# Altium PCB 电机驱动板-V5.0.PcbDoc (part 1 of 3)
Units mil, origin at the board's own origin, x right, y up, seen from the top; angles counter-clockwise.
Board outline 4724.41 x 4330.71 mil, 4 copper layers (Top Layer, NET-A, GND-A, Bottom Layer); 312 components, 201 nets, 977 pads, 515 vias.
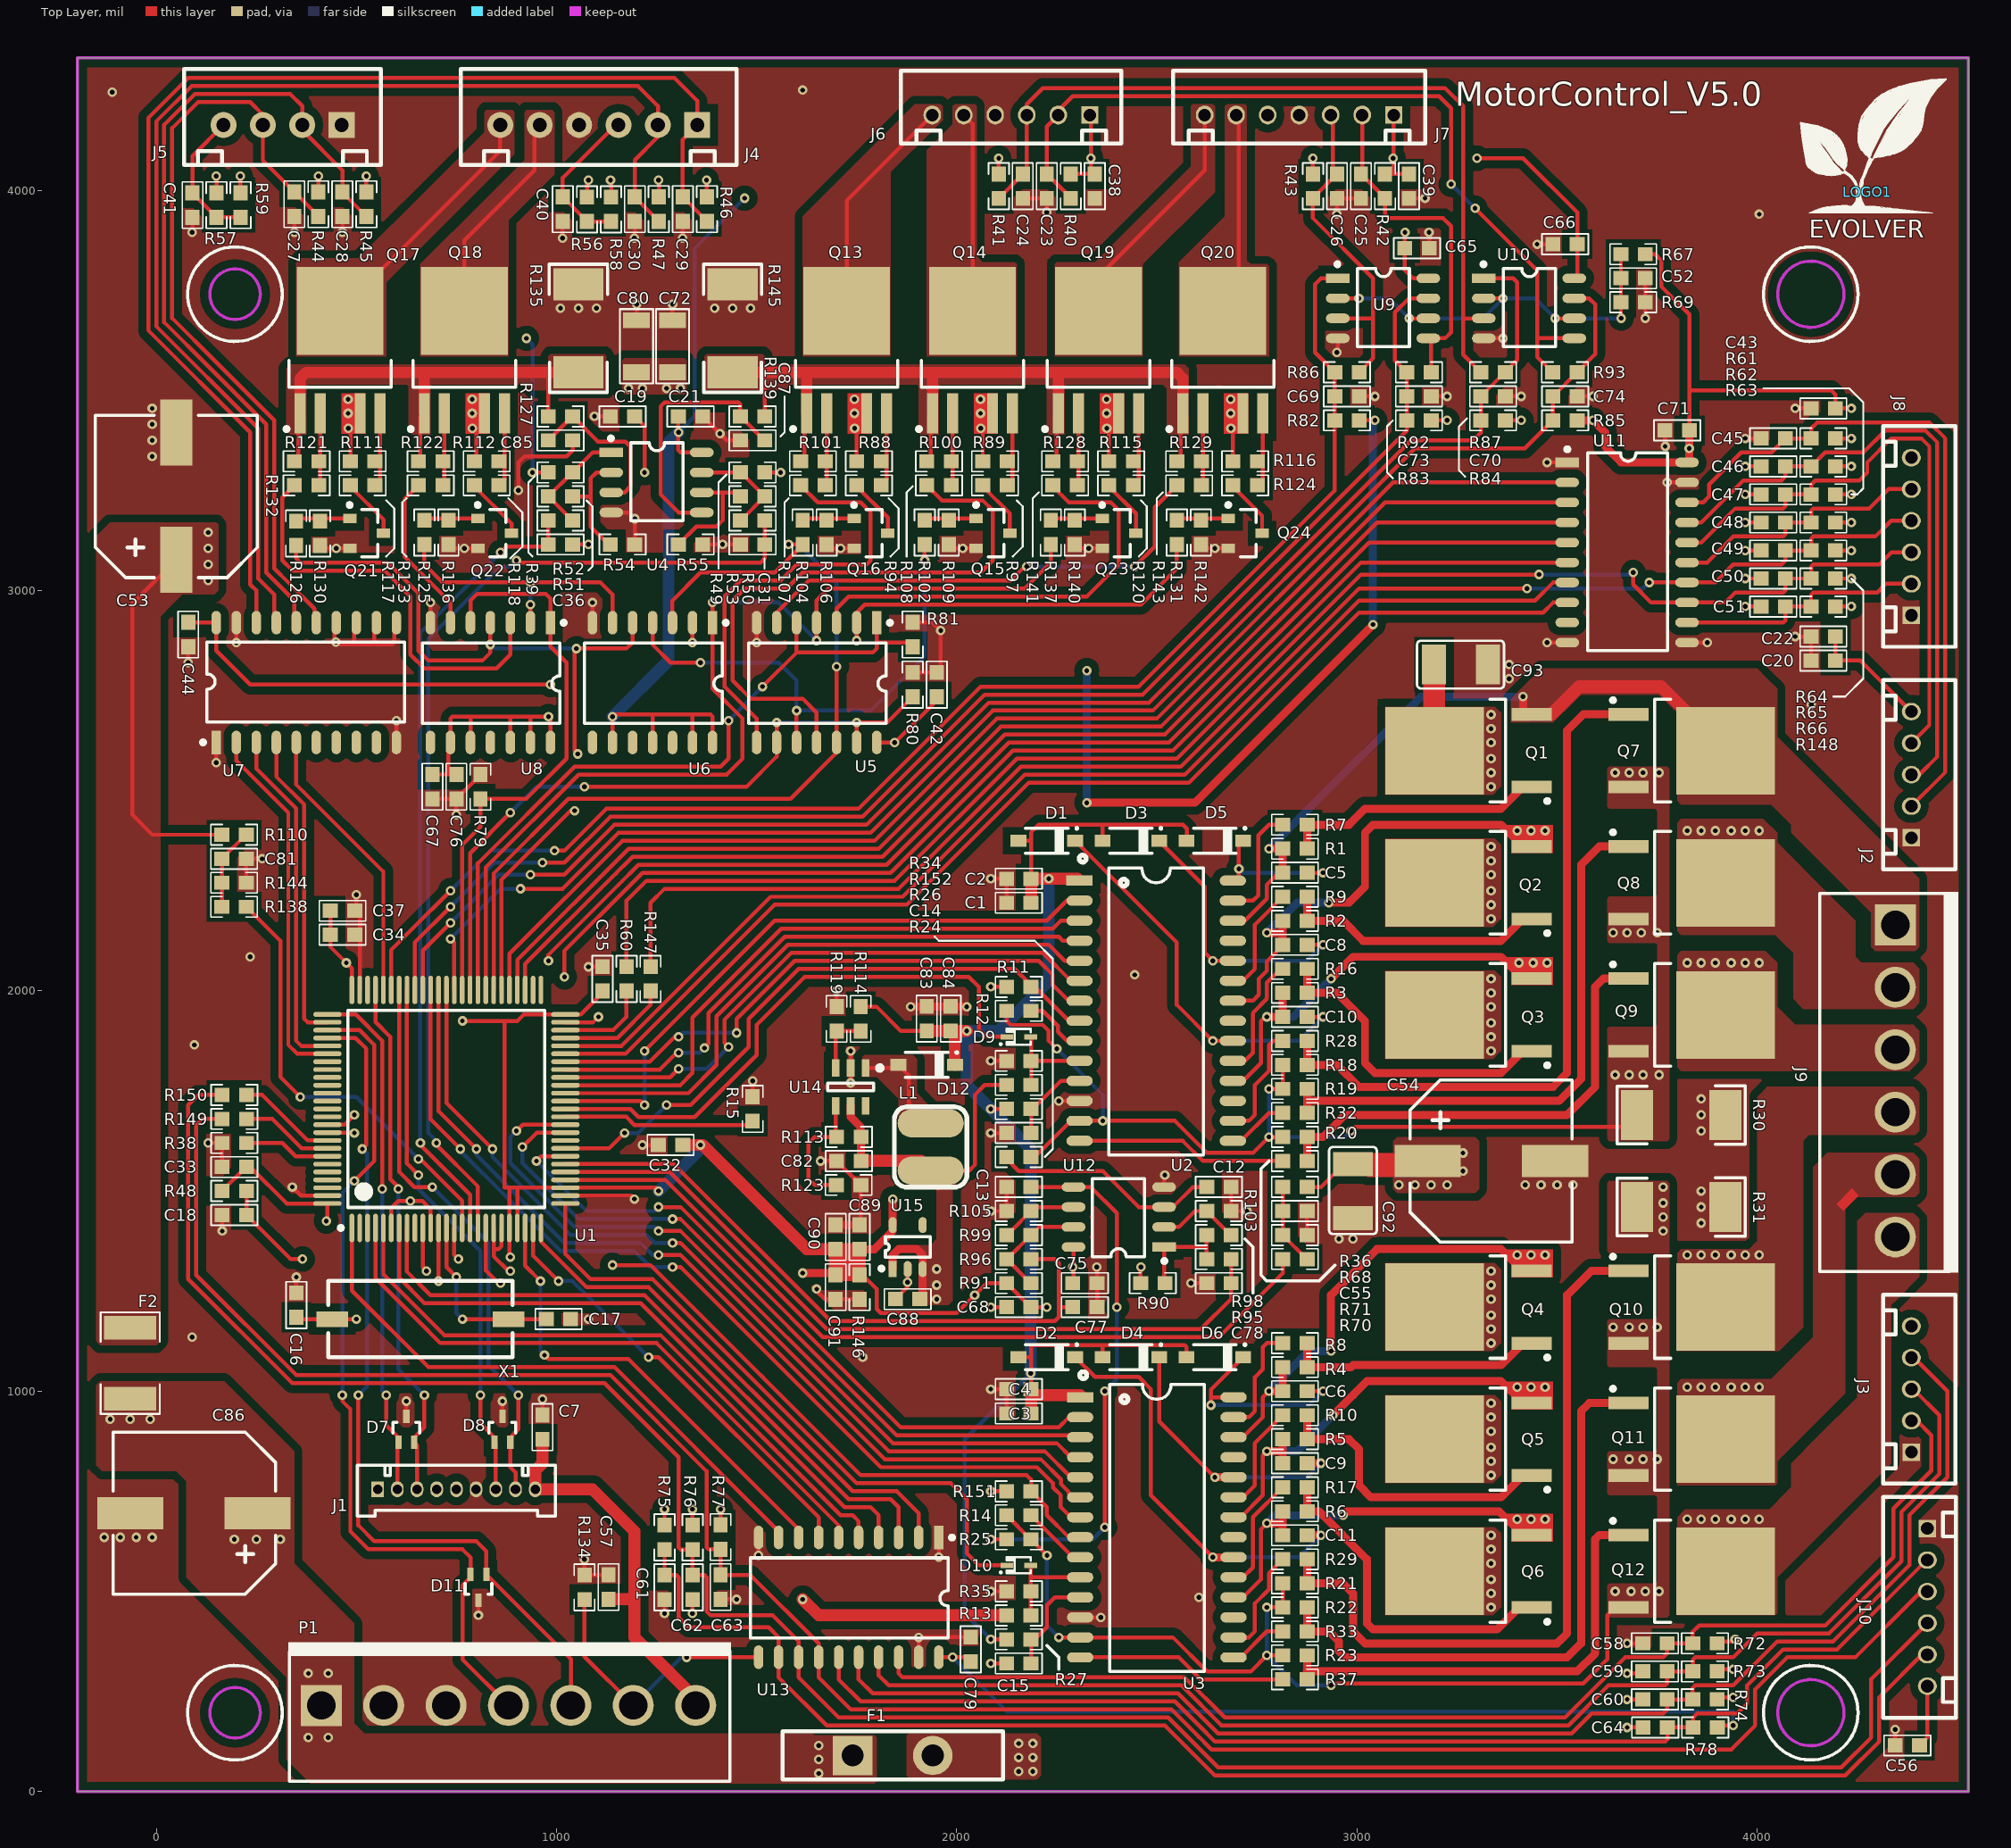
[diagram p0: Top Layer view]
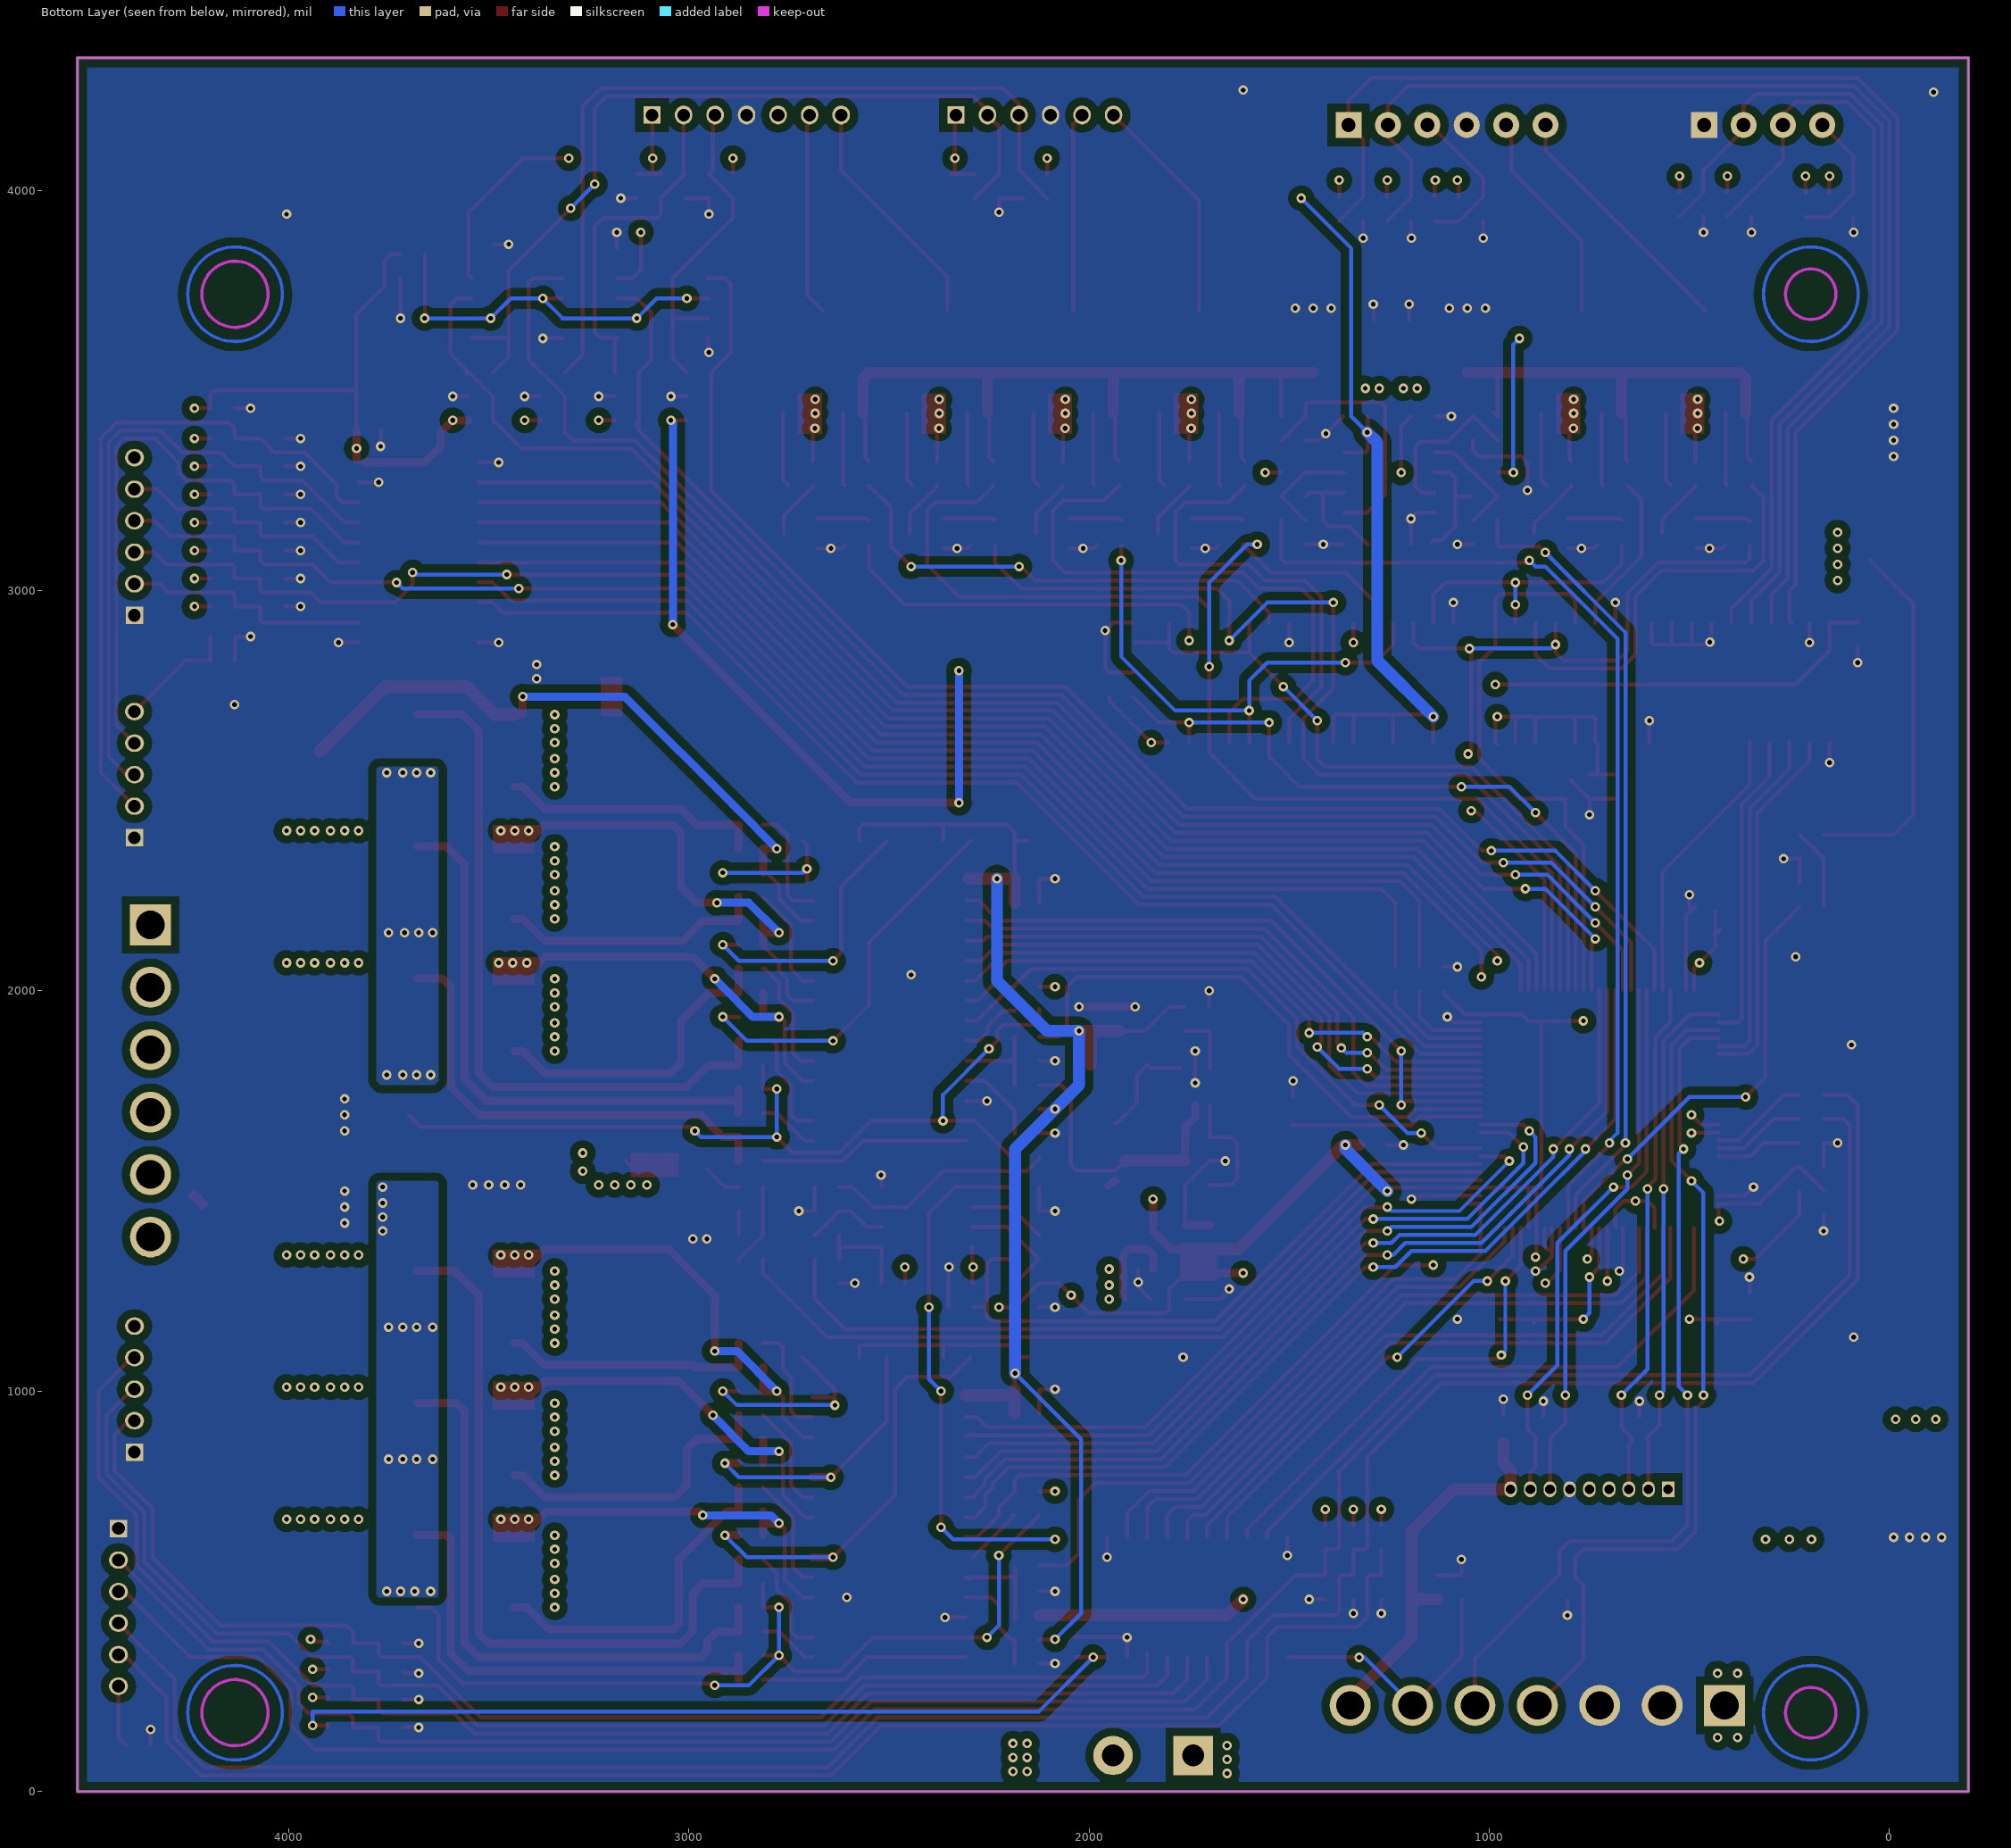
[diagram p1: Bottom Layer view, seen from below]
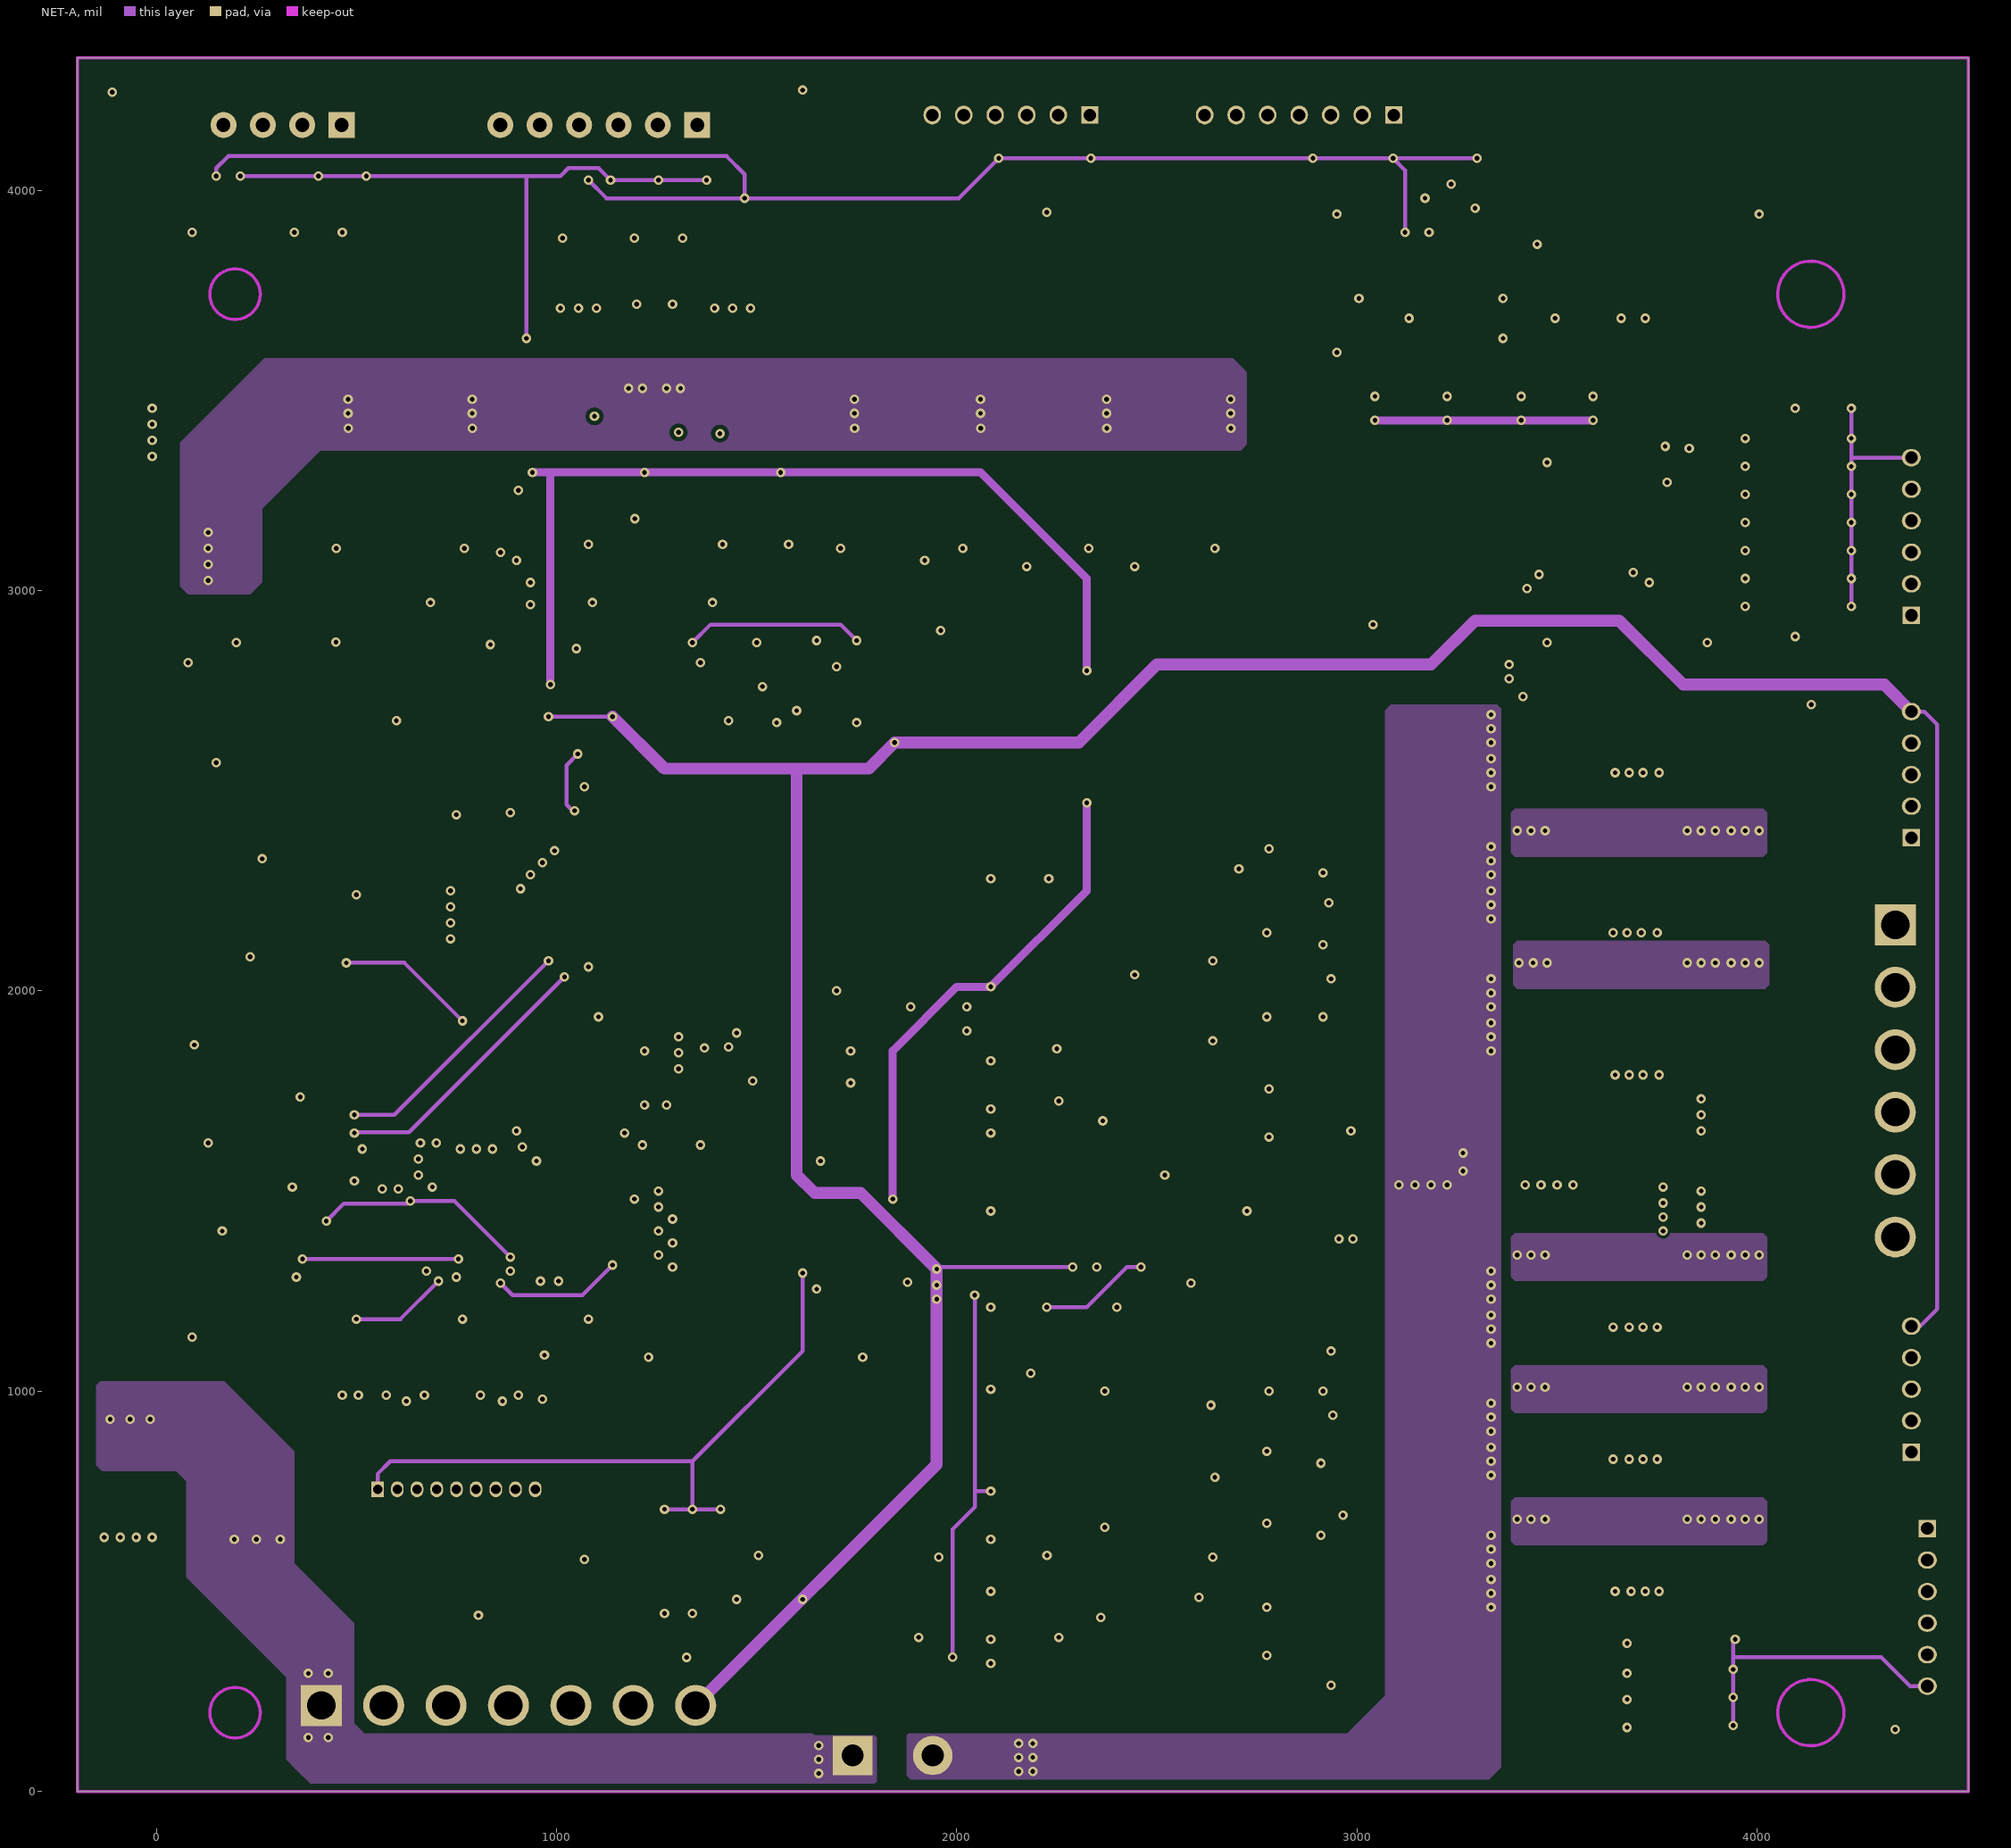
[diagram p2: NET-A]
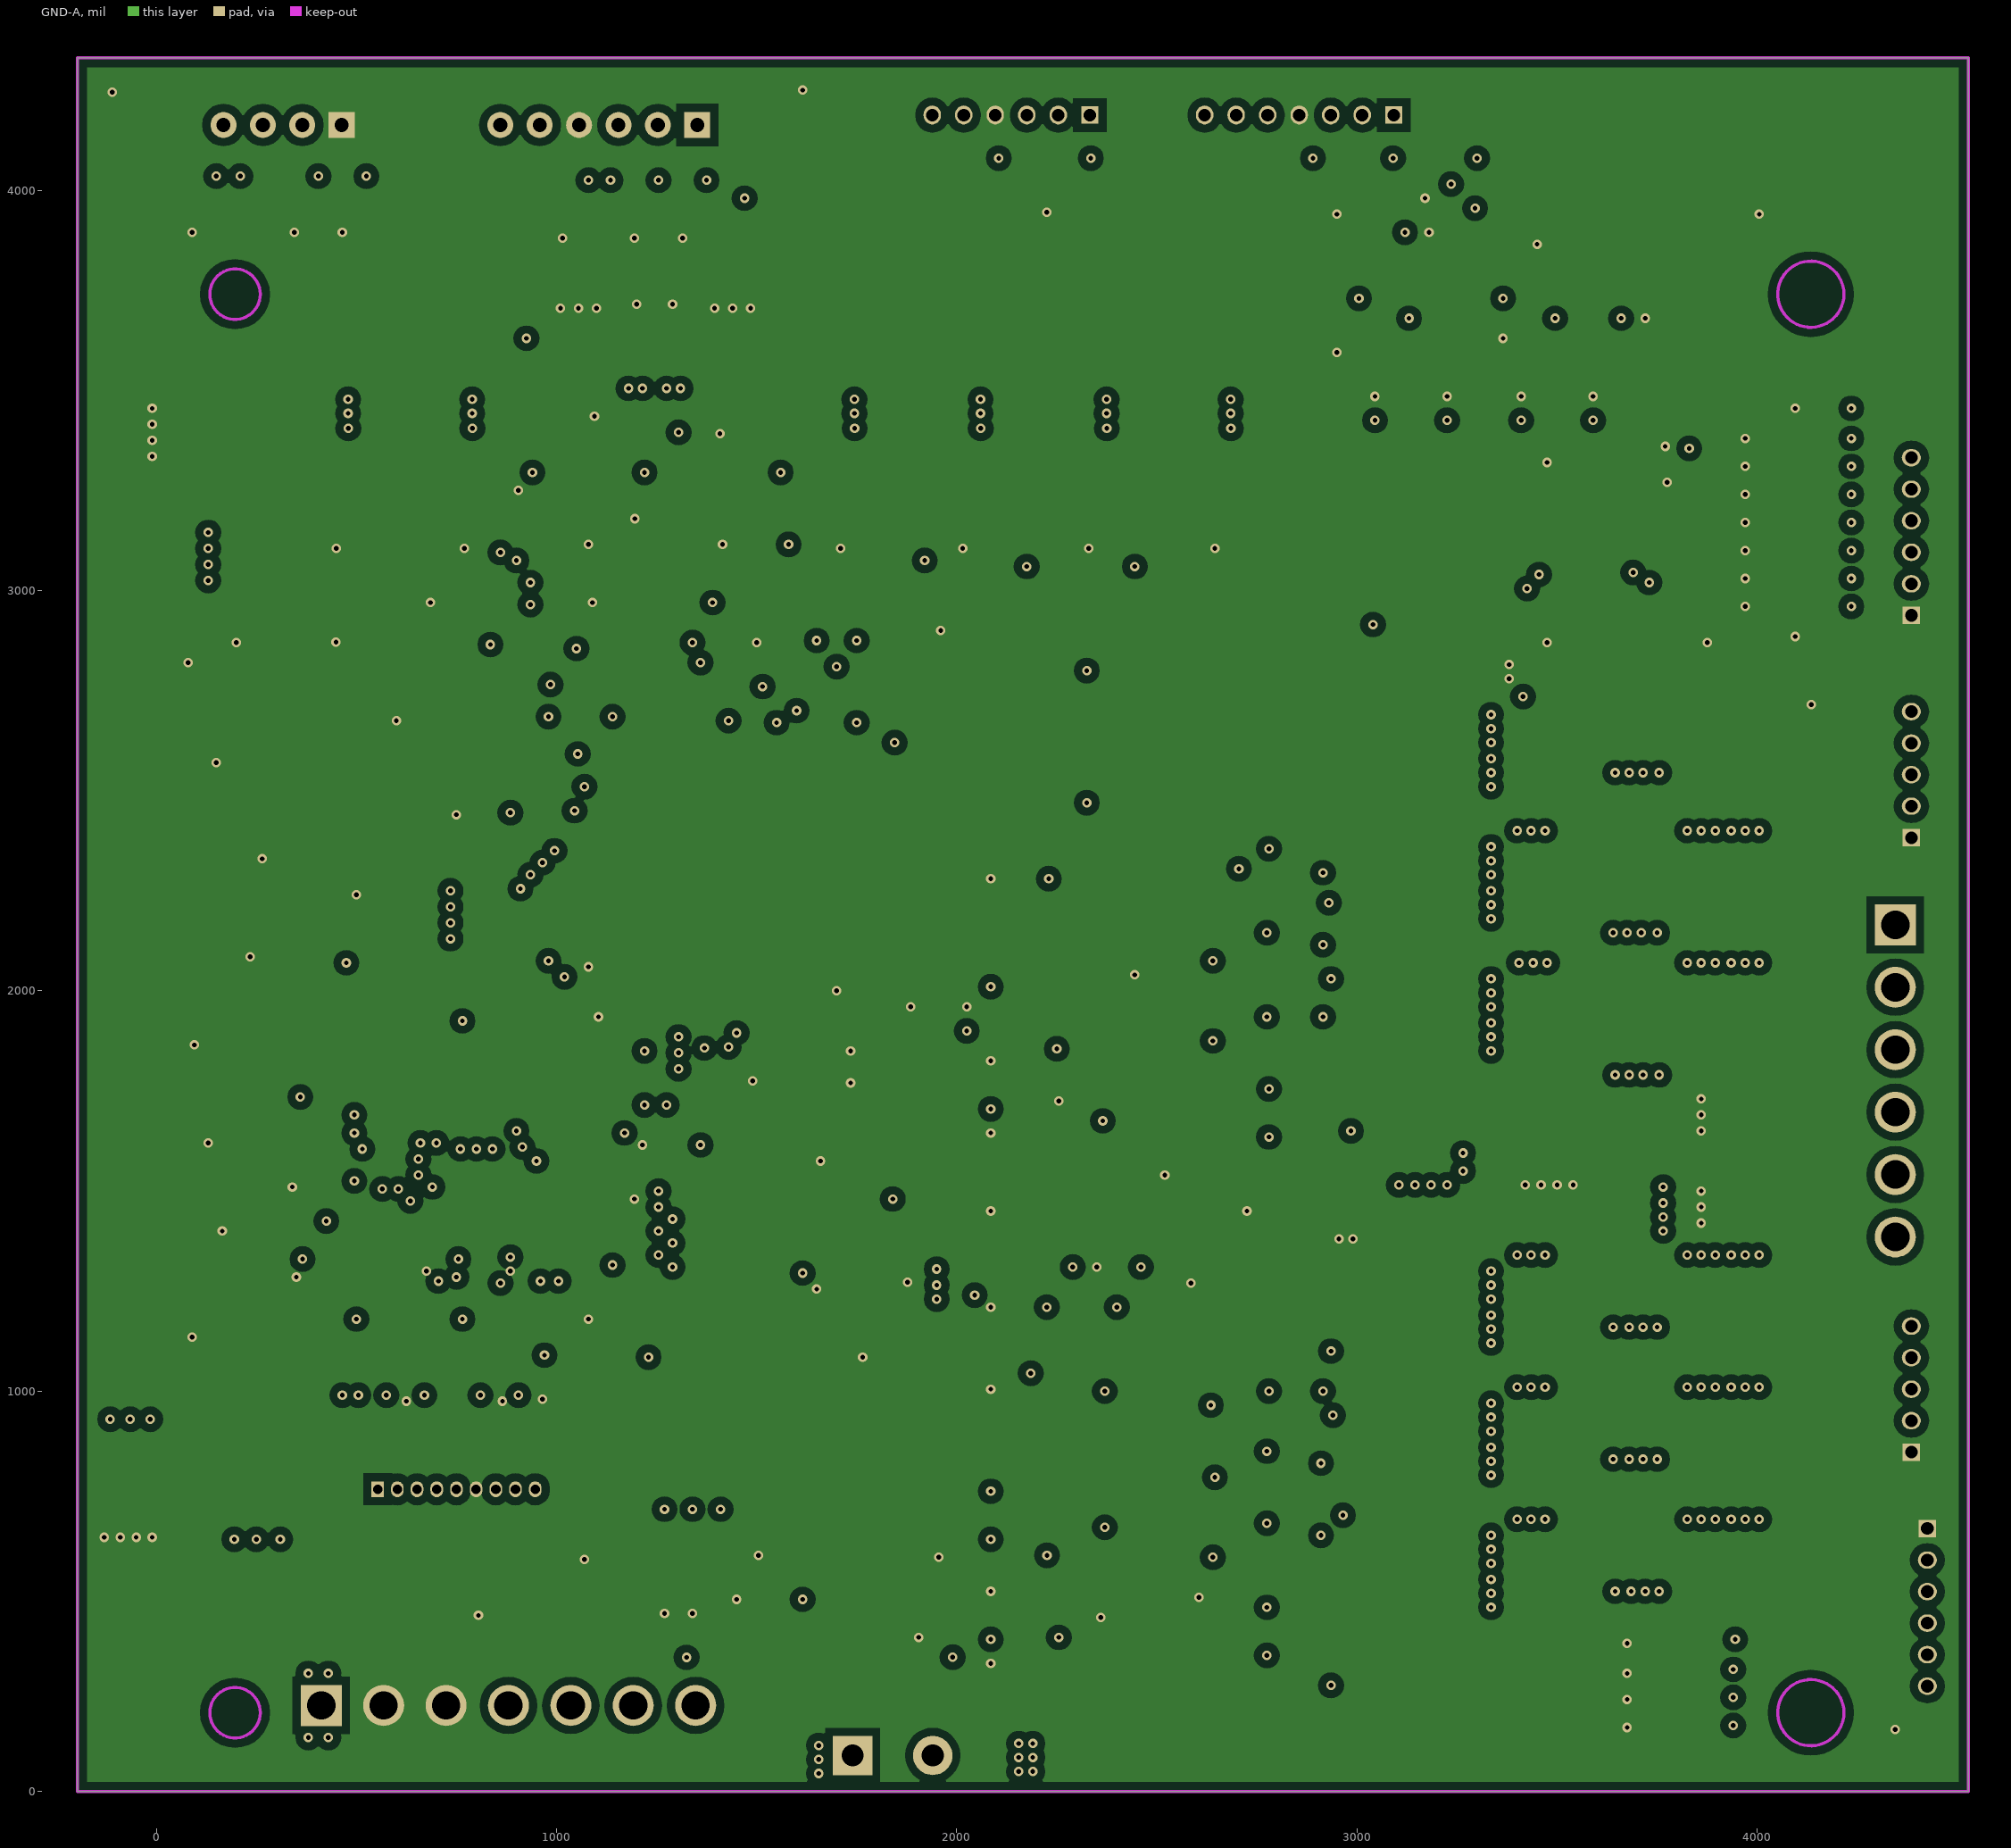
[diagram p3: GND-A]

## Layer stack, top to bottom
Top Layer: signal copper 1.4
Dielectric: core 12.6, FR-4, Dk 4.8
NET-A: signal copper 1.4
Dielectric: prepreg 12.6, FR-4, Dk 4.8
GND-A: signal copper 1.4
Dielectric: core 12.6, FR-4, Dk 4.8
Bottom Layer: signal copper 1.4

## Board outline
-196.85,0 -196.85,4330.71 4527.56,4330.71 4527.56,0

## Design rules (kind name [scope] priority, off if disabled: settings)
Clearance [All] p1: gap=7
ComponentClearance [All] p1: gap=0 collisioncheckmode=3 verticalgap=0 showdistances=FALSE
HoleToHoleClearance [All] p1: gap=0 allowstackedmicrovias=TRUE
MinimumSolderMaskSliver [All] p1: minsoldermaskwidth=0
PlaneConnect [All] p1: planeconnectstyle=Direct reliefexpansion=20 reliefentries=4 reliefconductorwidth=10 reliefairgap=10
PolygonConnect [All] p1: connectstyle=Direct reliefconductorwidth=10 reliefentries=4 polygonreliefangle="90 Angle"
RoutingVias [All] p1: holewidth=11.81 width=23.62 viastyle="Through Hole" minholewidth=11.81 minwidth=23.62 maxholewidth=118.11 maxwidth=236.22
SilkToSilkClearance [All] p1: silktosilkclearance=0
SilkscreenOverComponentPads [All] p1: minsilkscreentomaskgap=0
SolderMaskExpansion [All] p1: expansion=4
TestPointUsage [All] p1: valid=0 allowmultiple=FALSE
Testpoint [All] p1: side=15 testpointundercomponent=TRUE minsize=40 maxsize=100 preferedsize=60 minholesize=0 maxholesize=40 preferedholesize=32 testpointgrid=1 style=1023 order=0123456789
Width [All] p1: maxlimit=500 minlimit=7 preferedwidth=10
18 further rules are at their usual default settings.

## Components (designator, comment, footprint, x,y, rotation, side; value= is the part's Value field where it differs from the comment)
C1 "C0603" C0603_M1608 2155,2220 r180 top
C2 "C0603" C0603_M1608 2155,2280 r180 top
C3 "C0603" C0603_M1608 2155.03,944.4 r180 top
C4 "C0603" C0603_M1608 2155,1005 r180 top
C5 "C0603" C0603_M1608 2845,2295 r180 top
C6 "C0603" C0603_M1608 2845,1000 r180 top
C7 "C0603" C0603_M1608 965,910 r270 top
C8 "C0603" C0603_M1608 2845,2115 r180 top
C9 "C0603" C0603_M1608 2845,820 r180 top
C10 "C0603" C0603_M1608 2845,1935 r180 top
C11 "C0603" C0603_M1608 2845,640 r180 top
C12 "C0603" C0603_M1608 2655,1510 r0 top
C13 "C0603" C0603_M1608 2155,1510 r180 top
C14 "C0603" C0603_M1608 2155,1645 r180 top
C15 "C0603" C0603_M1608 2155,320 r180 top
C16 "C0603" C0603_M1608 350,1215 r270 top
C17 "C0603" C0603_M1608 1005,1180 r180 top
C18 "C0603" C0603_M1608 195,1440 r0 top
C19 "C0603" C0603_M1608 1165,3435 r180 top
C20 "C0603" C0603_M1608 4165,2825 r0 top
C21 "C0603" C0603_M1608 1335,3435 r0 top
C22 "C0603" C0603_M1608 4165,2885 r0 top
C23 "C0603" C0603_M1608 2225,4010 r270 top
C24 "C0603" C0603_M1608 2165,4010 r270 top
C25 "C0603" C0603_M1608 3010,4010 r270 top
C26 "C0603" C0603_M1608 2950,4010 r270 top
C27 "C0603" C0603_M1608 345,3965 r270 top
C28 "C0603" C0603_M1608 465,3965 r270 top
C29 "C0603" C0603_M1608 1315.68,3952.8 r270 top
C30 "C0603" C0603_M1608 1195.68,3952.8 r270 top
C31 "C0603" C0603_M1608 1490,3115 r180 top
C32 "C0603" C0603_M1608 1285,1615 r0 top
C33 "C0603" C0603_M1608 195,1560 r0 top
C34 "C0603" C0603_M1608 465.51,2140 r180 top
C35 "C0603" C0603_M1608 1115,2030 r270 top
C36 "C0603" C0603_M1608 1010,3115 r0 top
C37 "C0603" C0603_M1608 465.51,2200 r180 top
C38 "C0603" C0603_M1608 2345,4010 r270 top
C39 "C0603" C0603_M1608 3130,4010 r270 top
C40 "C0603" C0603_M1608 1015.68,3952.8 r270 top
C41 "C0603" C0603_M1608 90.68,3962.8 r270 top
C42 "C0603" C0603_M1608 1950,2765 r270 top
C43 "C0603" C0603_M1608 4165,3455 r180 top
C44 "C0603" C0603_M1608 80,2890 r90 top
C45 "C0603" C0603_M1608 4040,3380 r180 top
C46 "C0603" C0603_M1608 4040,3310 r180 top
C47 "C0603" C0603_M1608 4040,3240 r180 top
C48 "C0603" C0603_M1608 4040,3170 r180 top
C49 "C0603" C0603_M1608 4040,3100 r180 top
C50 "C0603" C0603_M1608 4040,3030 r180 top
C51 "C0603" C0603_M1608 4040,2960 r180 top
C52 "C0603" C0603_M1608 3690,3780 r0 top
C53 "10*105" CAP_SMD_10*105 50,3235 r180 top
C54 "10*105" CAP_SMD_10*105 3335,1575 r90 top
C55 "C0603" C0603_M1608 2845,1450 r0 top
C56 "C0603" C0603_M1608 4375,115 r180 top
C57 "C0603" C0603_M1608 1130,510.51 r270 top
C58 "C0603" C0603_M1608 3744.49,370 r180 top
C59 "C0603" C0603_M1608 3744.49,300 r180 top
C60 "C0603" C0603_M1608 3744.49,230 r180 top
C61 "C0603" C0603_M1608 1270,510 r270 top
C62 "C0603" C0603_M1608 1340,510 r270 top
C63 "C0603" C0603_M1608 1410,510.51 r270 top
C64 "C0603" C0603_M1608 3745,160 r180 top
C65 "C0603" C0603_M1608 3150,3855 r180 top
C66 "C0603" C0603_M1608 3520,3865 r0 top
C67 "C0603" C0603_M1608 690,2510 r90 top
C68 "C0603" C0603_M1608 2155,1210 r180 top
C69 "C0603" C0603_M1608 2975,3485 r0 top
C70 "C0603" C0603_M1608 3340,3485 r0 top
C71 "C0603" C0603_M1608 3800,3400 r180 top
C72 "C1206" C1206_M3216 1290,3610 r270 top
C73 "C0603" C0603_M1608 3155,3485 r0 top
C74 "C0603" C0603_M1608 3520,3485 r0 top
C75 "C0603" C0603_M1608 2320,1270 r0 top
C76 "C0603" C0603_M1608 750,2510 r270 top
C77 "C0603" C0603_M1608 2320,1210 r0 top
C78 "C0603" C0603_M1608 2655,1270 r180 top
C79 "C0603" C0603_M1608 2035,355 r90 top
C80 "C1206" C1206_M3216 1200,3610 r270 top
C81 "C0603" C0603_M1608 194.49,2330 r0 top
C82 "C0603" C0603_M1608 1730.51,1575 r180 top
C83 "C0603" C0603_M1608 1925,1930.51 r90 top
C84 "C0603" C0603_M1608 1985,1930.51 r90 top
C85 "C0603" C0603_M1608 1010,3375 r0 top
C86 "10*105" CAP_SMD_10*105 95,695 r270 top
C87 "C0603" C0603_M1608 1490,3375 r180 top
C88 "C0603" C0603_M1608 1877.4,1230 r0 top
C89 "C0603" C0603_M1608 1757.4,1385 r90 top
C90 "C0603" C0603_M1608 1697.4,1385 r90 top
C91 "C0603" C0603_M1608 1697.4,1260 r270 top
C92 "C1210" C1210_M3225 2990,1500 r90 top
C93 "C1210" C1210_M3225 3260,2815 r180 top
D1 "SOD-123" SOD-123 2225,2375 r0 top
D2 "SOD-123" SOD-123 2225,1085 r0 top
D3 "SOD-123" SOD-123 2435,2375 r0 top
D4 "SOD-123" SOD-123 2435,1085 r0 top
D5 "SOD-123" SOD-123 2645,2375 r0 top
D6 "SOD-123" SOD-123 2645,1085 r0 top
D7 "SOT-523" SOT-523 625,905 r90 top
D8 "SOT-523" SOT-523 865,905 r90 top
D9 "SOD-523" SOD-523 2155,1885 r180 top
D10 "SOD-523" SOD-523 2155,565 r180 top
D11 "SOT-523" SOT-523 805,510 r270 top
D12 "SOD-123" SOD-123 1925,1815 r0 top
F1 "BK30-400" FUSE-FRG-5MM 1840,90 r0 top
F2 "R1812" R1812_M4532 -65,1070 r90 top
J1 "1.25T-1-A-9P" 1.25T-1-A-9P 750,755 r0 top
J2 "PH-A-5P" PH-A-5P 4385,2540 r90 top
J3 "PH-A-5P" PH-A-5P 4385,1005 r90 top
J4 "XH-A-6P" XH-A-6P 1105.68,4162.8 r180 top
J5 "XH-A-4P" XH-A-4P 315.68,4162.8 r180 top
J6 "PH-A-6P" PH-A-6P 2135.68,4187.8 r180 top
J7 "PH-A-7P" PH-A-7P 2855.68,4187.8 r180 top
J8 "PH-A-6P" PH-A-6P 4385,3135 r90 top
J9 "VH-A-6P" VH-A-6P 4345,1775 r270 top
J10 "PH-A-6P" PH-A-6P 4425,460 r270 top
L1 "CD-42T" CD-42T 1935,1610 r90 top
LOGO1 "LOGO" LOGO 4275,3995 r0 top
P1 "VH-A-7P" VH-A-7P 880,215 r0 top
Q1 "TO-252-2L" TO-252-2L 3315,2600 r90 top
Q2 "TO-252-2L" TO-252-2L 3315,2270 r90 top
Q3 "TO-252-2L" TO-252-2L 3315,1940 r90 top
Q4 "TO-252-2L" TO-252-2L 3315,1210 r90 top
Q5 "TO-252-2L" TO-252-2L 3315,880 r90 top
Q6 "TO-252-2L" TO-252-2L 3315,550 r90 top
Q7 "TO-252-2L" TO-252-2L 3800,2600 r270 top
Q8 "TO-252-2L" TO-252-2L 3800,2270 r270 top
Q9 "TO-252-2L" TO-252-2L 3800,1940 r270 top
Q10 "TO-252-2L" TO-252-2L 3800,1210 r270 top
Q11 "TO-252-2L" TO-252-2L 3800,880 r270 top
Q12 "TO-252-2L" TO-252-2L 3800,550 r270 top
Q13 "TO-252-4" TO-252-4L 1724.97,3570.61 r0 top
Q14 "TO-252-4" TO-252-4L 2039.38,3570.61 r0 top
Q15 "SOT-23-3" SOT-23-3 2090.68,3142.8 r0 top
Q16 "SOT-23-3" SOT-23-3 1785.68,3142.8 r0 top
Q17 "TO-252-4" TO-252-4L 459.38,3570.61 r0 top
Q18 "TO-252-4" TO-252-4L 769.97,3570.61 r0 top
Q19 "TO-252-4" TO-252-4L 2354.38,3570.61 r0 top
Q20 "TO-252-4" TO-252-4L 2664.97,3570.61 r0 top
Q21 "SOT-23-3" SOT-23-3 525.68,3142.8 r0 top
Q22 "SOT-23-3" SOT-23-3 845.68,3142.8 r0 top
Q23 "SOT-23-3" SOT-23-3 2405.68,3142.8 r0 top
Q24 "SOT-23-3" SOT-23-3 2720.68,3142.8 r0 top
R1 "10K" R0603_M1608 2845,2355 r0 top
R2 "10K" R0603_M1608 2845,2175 r0 top
R3 "10K" R0603_M1608 2845,1995 r0 top
R4 "10K" R0603_M1608 2845,1060 r0 top
R5 "10K" R0603_M1608 2845,880 r0 top
R6 "10K" R0603_M1608 2845,700 r180 top
R7 "C0603" R0603_M1608 2845,2415 r180 top
R8 "C0603" R0603_M1608 2845,1120 r180 top
R9 "C0603" R0603_M1608 2845,2235 r180 top
R10 "C0603" R0603_M1608 2845,940 r180 top
R11 "C0603" R0603_M1608 2155,2010 r180 top
R12 "C0603" R0603_M1608 2155,1950 r0 top
R13 "C0603" R0603_M1608 2155,440 r0 top
R14 "C0603" R0603_M1608 2155,690 r0 top
R15 "R0603" R0603_M1608 1490,1705 r90 top
R16 "C0603" R0603_M1608 2845,2055 r180 top
R17 "C0603" R0603_M1608 2845,760 r180 top
R18 "10K" R0603_M1608 2845,1815 r180 top
R19 "10K" R0603_M1608 2845,1755 r0 top
R20 "10K" R0603_M1608 2845,1635 r0 top
R21 "10K" R0603_M1608 2845,520 r180 top
R22 "10K" R0603_M1608 2845.03,460 r180 top
R23 "10K" R0603_M1608 2845,340 r180 top
R24 "100R" R0603_M1608 2155,1585 r0 top
R25 "100R" R0603_M1608 2155,630 r0 top
R26 "C0603" R0603_M1608 2155,1705 r0 top
R27 "C0603" R0603_M1608 2155,380 r0 top
R28 "C0603" R0603_M1608 2845,1875 r180 top
R29 "C0603" R0603_M1608 2845,580 r180 top
R30 "R2512" R2512_M6332 3810,1690 r180 top
R31 "R2512" R2512_M6332 3810,1460 r180 top
R32 "C0603" R0603_M1608 2845,1695 r180 top
R33 "C0603" R0603_M1608 2845.03,400 r180 top
R34 "C0603" R0603_M1608 2155,1825 r0 top
R35 "C0603" R0603_M1608 2155,500 r0 top
R36 "C0603" R0603_M1608 2845,1575 r180 top
R37 "C0603" R0603_M1608 2845,280 r180 top
R38 "R0603" R0603_M1608 195,1620 r0 top
R39 "R0603" R0603_M1608 1010,3295 r180 top
R40 "R0603" R0603_M1608 2285,4010 r90 top
R41 "R0603" R0603_M1608 2105,4010 r90 top
R42 "R0603" R0603_M1608 3070,4010 r90 top
R43 "R0603" R0603_M1608 2890,4010 r90 top
R44 "R0603" R0603_M1608 405,3965 r90 top
R45 "R0603" R0603_M1608 525,3965 r90 top
R46 "R0603" R0603_M1608 1375.68,3952.8 r90 top
R47 "R0603" R0603_M1608 1255.68,3952.8 r90 top
R48 "R0603" R0603_M1608 195,1500 r180 top
R49 "R0603" R0603_M1608 1490,3295 r0 top
R50 "R0603" R0603_M1608 1490,3175 r0 top
R51 "R0603" R0603_M1608 1010,3175 r0 top
R52 "R0603" R0603_M1608 1010,3235 r180 top
R53 "R0603" R0603_M1608 1490,3235 r180 top
R54 "R0603" R0603_M1608 1165,3115 r0 top
R55 "R0603" R0603_M1608 1335,3115 r0 top
R56 "R0603" R0603_M1608 1076.27,3952.33 r90 top
R57 "R0603" R0603_M1608 150.68,3962.8 r90 top
R58 "R0603" R0603_M1608 1136.27,3952.33 r90 top
R59 "R0603" R0603_M1608 210.68,3962.8 r90 top
R60 "C0603" R0603_M1608 1175,2030 r270 top
R61 "C0603" R0603_M1608 4165,3380 r180 top
R62 "C0603" R0603_M1608 4165,3310 r180 top
R63 "C0603" R0603_M1608 4165,3240 r180 top
R64 "C0603" R0603_M1608 4165,3170 r180 top
R65 "C0603" R0603_M1608 4165,3100 r180 top
R66 "C0603" R0603_M1608 4165,3030 r180 top
R67 "R0603" R0603_M1608 3690,3840 r0 top
R68 "C0603" R0603_M1608 2845,1510 r180 top
R69 "R0603" R0603_M1608 3690,3720 r180 top
R70 "R0603" R0603_M1608 2845,1330 r0 top
R71 "C0603" R0603_M1608 2845,1390 r0 top
R72 "C0603" R0603_M1608 3869.49,370 r180 top
R73 "C0603" R0603_M1608 3869.49,300 r180 top
R74 "C0603" R0603_M1608 3869.49,230 r180 top
R75 "C0603" R0603_M1608 1270,635 r270 top
R76 "C0603" R0603_M1608 1340,635 r270 top
R77 "C0603" R0603_M1608 1410,635.51 r270 top
R78 "C0603" R0603_M1608 3870,160 r180 top
R79 "R0603" R0603_M1608 810,2510 r270 top
R80 "R0603" R0603_M1608 1890,2765 r270 top
R81 "R0603" R0603_M1608 1890,2890 r270 top
R82 "R0603" R0603_M1608 2975,3425 r0 top
R83 "R0603" R0603_M1608 3155,3425 r0 top
R84 "R0603" R0603_M1608 3340,3425 r0 top
R85 "R0603" R0603_M1608 3520,3425 r0 top
R86 "R0603" R0603_M1608 2975,3545 r180 top
R87 "R0603" R0603_M1608 3340,3545 r0 top
R88 "R0603" R0603_M1608 1780.68,3322.8 r180 top
R89 "R0603" R0603_M1608 2095.68,3322.8 r180 top
R90 "R0603" R0603_M1608 2490,1270 r180 top
R91 "R0603" R0603_M1608 2155,1270 r180 top
R92 "R0603" R0603_M1608 3155,3545 r0 top
R93 "R0603" R0603_M1608 3519.49,3545 r180 top
R94 "R0603" R0603_M1608 1780.68,3262.8 r0 top
R95 "R0603" R0603_M1608 2655,1330 r180 top
R96 "R0603" R0603_M1608 2155,1330 r0 top
R97 "R0603" R0603_M1608 2095.68,3262.8 r0 top
R98 "R0603" R0603_M1608 2655,1390 r180 top
R99 "R0603" R0603_M1608 2155,1390 r180 top
R100 "R0603" R0603_M1608 1955.68,3322.8 r0 top
R101 "R0603" R0603_M1608 1640.68,3322.8 r0 top
R102 "R0603" R0603_M1608 1920,3145 r90 top
R103 "R0603" R0603_M1608 2655,1450 r0 top
R104 "R0603" R0603_M1608 1615,3145 r270 top
R105 "R0603" R0603_M1608 2155,1450 r180 top
R106 "R0603" R0603_M1608 1675,3145 r90 top
R107 "R0603" R0603_M1608 1640.68,3262.8 r180 top
R108 "R0603" R0603_M1608 1955.68,3262.8 r180 top
R109 "R0603" R0603_M1608 1980,3145 r90 top
R110 "C0603" R0603_M1608 194.49,2390 r0 top
R111 "R0603" R0603_M1608 515.68,3322.8 r0 top
R112 "R0603" R0603_M1608 825.68,3322.8 r0 top
R113 "C0603" R0603_M1608 1730.51,1635 r180 top
R114 "C0603" R0603_M1608 1760,1930 r270 top
R115 "R0603" R0603_M1608 2410.68,3322.8 r180 top
R116 "R0603" R0603_M1608 2720.68,3322.8 r180 top
R117 "R0603" R0603_M1608 515.68,3262.8 r0 top
R118 "R0603" R0603_M1608 825.68,3262.8 r180 top
R119 "C0603" R0603_M1608 1700,1930 r90 top
R120 "R0603" R0603_M1608 2410.68,3262.8 r0 top
R121 "R0603" R0603_M1608 375.68,3322.8 r180 top
R122 "R0603" R0603_M1608 685.68,3322.8 r180 top
R123 "C0603" R0603_M1608 1730,1515 r0 top
R124 "R0603" R0603_M1608 2720.68,3262.8 r0 top
R125 "R0603" R0603_M1608 670,3145 r90 top
R126 "R0603" R0603_M1608 349.41,3142.8 r270 top
R127 "R0603" R0603_M1608 1010,3435 r180 top
R128 "R0603" R0603_M1608 2270.68,3322.8 r0 top
R129 "R0603" R0603_M1608 2580.68,3322.8 r0 top
R130 "R0603" R0603_M1608 409.41,3142.8 r90 top
R131 "R0603" R0603_M1608 2550,3145 r90 top
R132 "R0603" R0603_M1608 375.68,3262.8 r180 top
R133 "R0603" R0603_M1608 685.68,3262.8 r180 top
R134 "R0603" R0603_M1608 1070,510 r270 top
R135 "R2512" R2512_M6332 1055,3655 r270 top
R136 "R0603" R0603_M1608 730,3145 r270 top
R137 "R0603" R0603_M1608 2235,3145 r270 top
R138 "R0603" R0603_M1608 194.49,2210 r180 top
R139 "R0603" R0603_M1608 1490,3435 r0 top
R140 "R0603" R0603_M1608 2295,3145 r90 top
R141 "R0603" R0603_M1608 2270.68,3262.8 r180 top
R142 "R0603" R0603_M1608 2610,3145 r90 top
R143 "R0603" R0603_M1608 2580.68,3262.8 r180 top
R144 "C0603" R0603_M1608 194.49,2270 r0 top
R145 "R2512" R2512_M6332 1440,3655 r270 top
R146 "R0603" R0603_M1608 1757.4,1260 r90 top
R147 "C0603" R0603_M1608 1235,2030 r270 top
R148 "C0603" R0603_M1608 4165,2960 r180 top
R149 "C0603" R0603_M1608 195,1680 r0 top
R150 "C0603" R0603_M1608 195,1740 r0 top
R151 "C0603" R0603_M1608 2155,750 r180 top
R152 "C0603" R0603_M1608 2155,1765 r0 top
U1 "STM32F103VCT6" LQFP100_N 725,1705 r90 top
U2 "PG-DSO28-17" PG-DSO28-17 2498.41,1950.27 r0 top
U3 "PG-DSO28-17" PG-DSO28-17 2500,660 r0 top
U4 "SOIC-8" SOIC-8 1250,3270 r0 top
U5 "SO-14" SOP-14 1650,2770 r270 top
U6 "SO-14" SOP-14 1240,2770 r270 top
U7 "SOIC-20" SOP-20 375,2770 r90 top
U8 "SO-14" SOP-14 835,2770 r270 top
U9 "SOIC-8" SOIC-8 3065,3705 r0 top
U10 "SOIC-8" SOIC-8 3430,3705 r0 top
U11 "SOP-20" SOP-20 3675,3095 r0 top
U12 "SOIC-8" SOIC-8 2405,1435 r180 top
U13 "SOP-20" SOP-20 1730,485 r270 top
U14 "SOT26" SOT26 1735,1760 r270 top
U15 "SOT-23-5" SOT-23-5 1877.4,1360 r90 top
X1 "" HC-49SMD 660,1180 r180 top

## Footprints (in the part's own frame and the unit in brackets; to place one, negate y for a bottom-side part, rotate by r counter-clockwise, add the part's x,y. Pads: shape width x height; smd on the part's side, far side on the other; paste and mask are expansions set on the pad)
1.25T-1-A-9P [mm]
  rect 0.8x1 hole 0.6: 1(-5,0)
  oval 0.8x1 hole 0.6: 2(-3.75,0) 3(-2.5,0) 4(-1.25,0) 5(0,0) 6(1.25,0) 7(2.5,0) 8(3.75,0) 9(5,0)
  silkscreen extent -6.3,-1.7 6.29,1.52
C0603_M1608 [mm] "Chip Capacitor, 2-Leads, Body 1.6x0.8mm, IPC Medium Density"
  rect 0.95x0.9 smd: 1(-0.775,0) 2(0.775,0)
  silkscreen extent -1.48,-0.65 1.48,0.65
C1206_M3216 [mm]
  rect 1x1.7 smd: 1(-1.65,0) 2(1.65,0)
  silkscreen extent -2.36,-1.05 2.36,1.05
C1210_M3225 [mil]
  rect 60x99.37 smd: 1(-67.5,0) 2(67.5,0)
  silkscreen extent -107,-60 110,60
CAP_SMD_10*105 [mm]
  rect 2.05x4.2 smd: 1(0,4.013) 2(0,-4.064)
  silkscreen extent -5.15,-5.15 5.15,5.15
CD-42T [mm]
  oval 1.8x4.2 smd: 1(-1.5,0) 2(1.5,0)
  silkscreen extent -2.55,-2.3 2.55,2.3
FUSE-FRG-5MM [mm]
  rect 2.5x2.5 hole 1.4: 1(-2.54,0)
  round 2.5 hole 1.4: 2(2.54,0)
  silkscreen extent -7,-1.52 7,1.52
HC-49SMD [mm]
  rect 2x1 smd: 1(-5.588,0) 2(5.588,0)
  silkscreen extent -5.84,-2.41 5.84,2.41
LOGO [mil]
  silkscreen extent -166,-51 196,282
LQFP100_N [mm]
  oval 1.8x0.3 smd: 1(-7.55,6) 2(-7.55,5.5) 3(-7.55,5) 4(-7.55,4.5) 5(-7.55,4) 6(-7.55,3.5) 7(-7.55,3) 8(-7.55,2.5) 9(-7.55,2) 10(-7.55,1.5) 11(-7.55,1) 12(-7.55,0.5) 13(-7.55,0) 14(-7.55,-0.5) 15(-7.55,-1) 16(-7.55,-1.5) 17(-7.55,-2) 18(-7.55,-2.5) 19(-7.55,-3) 20(-7.55,-3.5) 21(-7.55,-4) 22(-7.55,-4.5) 23(-7.55,-5) 24(-7.55,-5.5) 25(-7.55,-6) 51(7.55,-6) 52(7.55,-5.5) 53(7.55,-5) 54(7.55,-4.5) 55(7.55,-4) 56(7.55,-3.5) 57(7.55,-3) 58(7.55,-2.5) 59(7.55,-2) 60(7.55,-1.5) 61(7.55,-1) 62(7.55,-0.5) 63(7.55,0) 64(7.55,0.5) 65(7.55,1) 66(7.55,1.5) 67(7.55,2) 68(7.55,2.5) 69(7.55,3) 70(7.55,3.5) 71(7.55,4) 72(7.55,4.5) 73(7.55,5) 74(7.55,5.5) 75(7.55,6)
  oval 0.3x1.8 smd: 26(-6,-7.55) 27(-5.5,-7.55) 28(-5,-7.55) 29(-4.5,-7.55) 30(-4,-7.55) 31(-3.5,-7.55) 32(-3,-7.55) 33(-2.5,-7.55) 34(-2,-7.55) 35(-1.5,-7.55) 36(-1,-7.55) 37(-0.5,-7.55) 38(0,-7.55) 39(0.5,-7.55) 40(1,-7.55) 41(1.5,-7.55) 42(2,-7.55) 43(2.5,-7.55) 44(3,-7.55) 45(3.5,-7.55) 46(4,-7.55) 47(4.5,-7.55) 48(5,-7.55) 49(5.5,-7.55) 50(6,-7.55) 76(6,7.55) 77(5.5,7.55) 78(5,7.55) 79(4.5,7.55) 80(4,7.55) 81(3.5,7.55) 82(3,7.55) 83(2.5,7.55) 84(2,7.55) 85(1.5,7.55) 86(1,7.55) 87(0.5,7.55) 88(0,7.55) 89(-0.5,7.55) 90(-1,7.55) 91(-1.5,7.55) 92(-2,7.55) 93(-2.5,7.55) 94(-3,7.55) 95(-3.5,7.55) 96(-4,7.55) 97(-4.5,7.55) 98(-5,7.55) 99(-5.5,7.55) 100(-6,7.55)
  silkscreen extent -7.67,-6.25 6.25,6.82
PG-DSO28-17 [mm]
  rect 1.67x0.65 smd: 1(-4.865,8.255)
  oval 1.67x0.65 smd: 2(-4.865,6.985) 3(-4.865,5.715) 4(-4.865,4.445) 5(-4.865,3.175) 6(-4.865,1.905) 7(-4.865,0.635) 8(-4.865,-0.635) 9(-4.865,-1.905) 10(-4.865,-3.175) 11(-4.865,-4.445) 12(-4.865,-5.715) 13(-4.865,-6.985) 14(-4.865,-8.255) 15(4.865,-8.255) 16(4.865,-6.985) 17(4.865,-5.715) 18(4.865,-4.445) 19(4.865,-3.175) 20(4.865,-1.905) 21(4.865,-0.635) 22(4.865,0.635) 23(4.865,1.905) 24(4.865,3.175) 25(4.865,4.445) 26(4.865,5.715) 27(4.865,6.985) 28(4.865,8.255)
  silkscreen extent -4.89,-9.15 3,9.88
PH-A-5P [mm]
  rect 1.1x1.1 hole 0.8: 1(-4,0)
  oval 1.1x1.2 hole 0.8: 2(-2,0) 3(0,0) 4(2,0) 5(4,0)
  silkscreen extent -6,-2.8 6,1.8
PH-A-6P [mm]
  rect 1.1x1.1 hole 0.8: 1(-5,0)
  oval 1.1x1.2 hole 0.8: 2(-3,0) 3(-1,0) 4(1,0) 5(3,0) 6(5,0)
  silkscreen extent -7,-2.8 7,1.8
PH-A-7P [mm]
  rect 1.1x1.1 hole 0.8: 1(-6,0)
  oval 1.1x1.2 hole 0.8: 2(-4,0) 3(-2,0) 4(0,0) 5(2,0) 6(4,0) 7(6,0)
  silkscreen extent -8,-2.8 8,1.8
R0603_M1608 [mm]
  rect 0.95x0.9 smd: 1(-0.775,0) 2(0.775,0)
  silkscreen extent -1.48,-0.65 1.48,0.65
R1812_M4532 [mm]
  rect 1.5x3.3 smd: 1(-2.25,0) 2(2.25,0)
  silkscreen extent -3.23,-1.88 3.23,1.88
R2512_M6332 [mil]
  rect 80x125 smd: 1(-110,0) 2(110,0)
  silkscreen extent -160,-73 160,73
SOD-123 [mm]
  rect 1x0.75 smd: 1(-1.8,0) 2(1.8,0)
  silkscreen extent -1.35,-0.8 1.96,0.84
SOD-523 [mm]
  rect 0.8x0.35 smd: 1(-0.762,0) 2(0.762,0)
  silkscreen extent -0.76,-0.51 1.19,0.51
SOIC-8 [mm]
  rect 1.5x0.6 smd: 1(-2.872,1.905)
  oval 1.5x0.6 smd: 2(-2.872,0.635) 3(-2.872,-0.635) 4(-2.872,-1.905) 5(2.872,-1.905) 6(2.872,-0.635) 7(2.872,0.635) 8(2.872,1.905)
  silkscreen extent -3.02,-2.44 1.68,2.92
SOP-14 [mm]
  rect 1.5x0.6 smd: 1(-3.8,3.81)
  oval 1.5x0.6 smd: 2(-3.8,2.54) 3(-3.8,1.27) 4(-3.8,0) 5(-3.8,-1.27) 6(-3.8,-2.54) 7(-3.8,-3.81) 8(3.8,-3.81) 9(3.8,-2.54) 10(3.8,-1.27) 11(3.8,0) 12(3.8,1.27) 13(3.8,2.54) 14(3.8,3.81)
  silkscreen extent -3.92,-4.32 2.58,4.77
SOP-20 [mm]
  rect 1.5x0.6 smd: 1(-3.8,5.715)
  oval 1.5x0.6 smd: 2(-3.8,4.445) 3(-3.8,3.175) 4(-3.8,1.905) 5(-3.8,0.635) 6(-3.8,-0.635) 7(-3.8,-1.905) 8(-3.8,-3.175) 9(-3.8,-4.445) 10(-3.8,-5.715) 11(3.8,-5.715) 12(3.8,-4.445) 13(3.8,-3.175) 14(3.8,-1.905) 15(3.8,-0.635) 16(3.8,0.635) 17(3.8,1.905) 18(3.8,3.175) 19(3.8,4.445) 20(3.8,5.715)
  silkscreen extent -3.92,-6.22 2.58,6.68
SOT26 [mm]
  rect 1.1x0.5 smd: 1(-1.2,0.95) 2(-1.2,0) 3(-1.2,-0.95) 4(1.2,-0.95) 5(1.2,0) 6(1.2,0.95)
  silkscreen extent -1.35,-1.45 0.25,2, body extent -0.8,-1.45 0.8,1.45, height 1.45
SOT-23-3 [mm] "SOT23, 3-Leads, Body 2.9x1.3mm, Pitch 0.95mm, Lead Span 2.5mm, IPC High Density"
  rect 0.85x0.6 smd: 1(-1.075,0.95) 2(-1.075,-0.95) 3(1.075,0)
  silkscreen extent -1.2,-1.5 0.7,1.92, body extent -0.7,-1.5 0.7,1.5, height 1.1
SOT-23-5 [mil] "SOT23, 5-Leads, Body 3.1x3.0mm (max), Pitch 0.95mm, IPC Medium Density"
  rect 40x20 smd: 1(-55,37.4)
  oval 40x20 smd: 2(-55,0) 3(-55,-37.4) 4(55,-37.4) 5(55,37.4)
  silkscreen extent -59,-57 26,70
SOT-523 [mm] "SOT23, 3-Leads, Body 1.7x1.8mm (max), Pitch 0.50mm, IPC Medium Density"
  rect 0.85x0.4 smd: 1(-0.825,0.5) 2(-0.825,-0.5) 3(0.825,0)
  silkscreen extent -0.25,-0.85 0.43,0.85
TO-252-2L [mm]
  rect 0.8x2.55 smd: 1(-2.3,-3.075) 2(2.3,-3.075)
  rect 5.55x6.25 smd: 3(0,3.075)
  silkscreen extent -3.32,-4.2 3.25,-0.42
TO-252-4L [mm]
  rect 0.7x2.55 smd: 1(-2.54,-3.25) 2(-1.27,-3.25) 3(1.27,-3.25) 4(2.54,-3.25)
  rect 5.5x5.6 smd: 5(0,3.25)
  silkscreen extent -3.52,-4.37 3.25,0.1
VH-A-6P [mm]
  rect 2.6x2.6 hole 1.8: 1(-9.9,0)
  round 2.6 hole 1.8: 2(-5.94,0) 3(-1.98,0) 4(1.98,0) 5(5.94,0) 6(9.9,0)
  silkscreen extent -11.99,-4.8 12.17,4
VH-A-7P [mm]
  rect 2.6x2.6 hole 1.8: 1(-11.88,0)
  round 2.6 hole 1.8: 2(-7.92,0) 3(-3.96,0) 4(0,0) 5(3.96,0) 6(7.92,0) 7(11.88,0)
  silkscreen extent -13.97,-4.8 14.12,4
XH-A-4P [mil]
  rect 65x65 hole 35: 1(-147.64,0)
  round 65 hole 35: 2(-49.21,0) 3(49.21,0) 4(147.64,0)
  silkscreen extent -246,-140 246,100
XH-A-6P [mil]
  rect 65x65 hole 35: 1(-246.06,0)
  round 65 hole 35: 2(-147.64,0) 3(-49.21,0) 4(49.21,0) 5(147.64,0) 6(246.06,0)
  silkscreen extent -344,-140 344,100

## Part data
C1 C2 C3 C4 C5 C6 C8 C9 C10 C11 C14 C15: library part CAP, "Capacitor"
C7 C37 C42 C57 C67 C76 C83 C84 C85 C87 C88 C89 C90 C91: library part Cap, "Capacitor"
C12 C13 C16 C17 C18 C19 C20 C21 C22 C23 C24 C25 C26 C27 C28 C29 C30 C31 C32 C33 C34 C35 C36 C38 C39 C40 C41 C43 C44 C45 C46 C47 C48 C49 C50 C51 C52 C55 C56 C58 C59 C60 C61 C62 C63 C64 C65 C66 C68 C69 C70 C71 C73 C74 C75 C77 C78 C79 C81 C82 C92 C93: library part MCC0603, "Multilayer Ceramic Capacitor 0603"
C53 C54 C86: library part CAP_SMD_10*105, "SMD Capacitor 10*105"
C72 C80: library part MCC1206, "Multilayer Ceramic Capacitor 1206"
D1 D2 D3 D4 D5 D6 D12: library part Diode, "Default Diode"
D7 D8 D11: library part RClamp0502B, "Ultra-Low Capacitance TVS for ESD and CDE Protection"
D9 D10: library part 1N4148WT, "FAST SWITCHING DIODES"
F1 F2: library part PPTC
J1: "Header, 1.25mm,9-Pin"
J2 J3: "Header, 2.0mm,5-Pin"
J4: "Header, 2.5mm,6-Pin"
J5: "Header, 2.5mm,4-Pin"
J6 J8 J10: "Header, 2.0mm,6-Pin"
J7: "Header, 2.0mm,7-Pin"
J9: "Header, 3.96mm,6-Pin"
L1: library part L3*3*2-3A, "Inductor"
LOGO1: library part L-CD54, "Inductor CD54 Type"
P1: "Header, 3.96mm,7-Pin"
Q1 Q2 Q3 Q4 Q5 Q6 Q7 Q8 Q9 Q10 Q11 Q12: library part MOSN_1
Q13 Q14 Q17 Q18 Q19 Q20: library part MOS-DUAL-N/P
Q15 Q16 Q21 Q22 Q23 Q24: library part SS8050LT1, "NPN Bipolar Transistor"
R1 R2 R3 R4 R5 R6 R7 R8 R9 R10 R11 R12 R13 R14 R16 R17 R18 R19 R20 R21 R22 R23 R24 R25 R26 R27 R28 R29 R32 R33 R34 R35 R36 R37 R60 R61 R62 R63 R64 R65 R66 R68 R70 R71 R72 R73 R74 R75 R76 R77 R78 R79 R80 R81 R88 R89 R94 R97 R100 R101 R102 R104 R106 R107 R108 R109 R110 R113 R114 R115 R116 R117 R119 R120 R123 R124 R125 R126 R127 R128 R129 R130 R131 R134 R136 R137 R138 R139 R140 R141 R142 R143 R144 R146 R147 R148 R149 R150 R151 R152: library part Res1, "Resistor"
R15 R38 R39 R40 R41 R42 R43 R44 R45 R46 R47 R48 R49 R50 R51 R52 R53 R54 R55 R56 R57 R58 R59 R67 R69 R82 R83 R84 R85 R86 R87 R90 R91 R92 R93 R95 R96 R98 R99 R103 R105 R111 R112 R118 R121 R122 R132 R133: library part R0603_M1608, "Resistor"
R30 R31 R135 R145: library part R2512_M6332, "Resistor"
U1: library part STM32F103V8T6
U2 U3: library part 6EDL04N02
U4 U12: library part LM393ADR, "Dual Differential Comparators"
U5 U8: library part SN74AHCT08N, "Quadruple 2-Input Positive-AND Gate"
U6: library part SN74ACT14N, "Hex Schmitt-Trigger Inverter"
U7: library part SN74HC245NSR, "Octal Bus Transceivers With 3-State Outputs"
U9 U10: library part OP
U11 U13: library part 74HC245
U14: library part FP6291
U15: library part XC6503D331MR-G, "Capacitor-Less 500mA Low Power Consumption High Speed LDO Regulator"
X1: library part XTAL

## Via types
v1: diameter 23.62, hole 11.81, Top Layer to Bottom Layer, tented both sides, 513 vias
v2: diameter 23.62, hole 11.81, Top Layer to Bottom Layer, 2 vias

## Nets (pads, with @x,y where several pads share a name; then routed paths per layer and width w, separated by ;. In a path a pad name is that pad's centre, name@x,y a point inside that pad or via, vN(x,y) a via of type N, cw(c..) or ccw(c..) an arc to the next point about the centre after c; other vN are vias at no path point)
+15V: C1.1 C2.1 C3.1 C4.1 C83.1 C84.1 D1.1 D2.1 D3.1 D4.1 D5.1 D6.1 D12.2 R26.1 R27.1 R114.1 U2.1 U3.1 | length 4235.4
  Top Layer w10: R114.1@1760,1960.51 1799.49,1960.51 1860,1900 C83.1@1925,1900 ; D12.2@1985,1825.87 D12.2@1995.87,1815 ; v1(2085,1705) R26.1@2124.49,1705 ; v1@2090,380 R27.1@2124.49,380 ; D1.1@2154.13,2375 2185.51,2375 ; D2.1@2155,1085 D2.1@2154.13,1085 2185.51,1085 ; C2.1@2185.51,2280 2185.51,2375 ; C4.1@2190.51,1000 C4.1@2185.51,1005 2185.51,1085 ; U2.1@2302.15,2280 U2.1@2306.87,2275.27 ; D4.1@2364.13,1085 2364.13,1114.13 ; D3.1@2364.13,2375 2364.13,2414.13 2365,2415 ; D6.1@2574.13,1085 2574.13,1110.87 2570,1115 2190,1115 2185.51,1110.51 2185.51,1085 ; D5.1@2574.13,2375 2575,2375.87 2575,2405 2565,2415 2365,2415 ; 2185.51,2375 2185.51,2395.51 2205,2415 2365,2415
  Top Layer w30: C83.1@1925,1900 C84.1@1985,1900 ; D12.2@1995.87,1815 1995,1815.87 1995,1890 C84.1@1985,1900 ; v1(2025,1900) C84.1@1985,1900 ; C3.1@2185.54,944.4 C4.1@2185.51,1005 ; C1.1@2185.51,2220 C2.1@2185.51,2280 v1(2230,2280) U2.1@2302.15,2280 ; C4.1@2190.51,990 U3.1@2308.46,990
  Bottom Layer w10: v1(2085,380) 2020,445 2020,880 v1(2185,1045)
  Bottom Layer w30: v1(2185,1045) 2185,1605 v1(2085,1705) 2025,1765 v1(2025,1900) 2105,1900 2230,2025 v1(2230,2280)
ADC-H-IN: C85.1 R127.1 U4.3 | length 414.4
  Top Layer w10: C85.1@979.49,3375 R127.1@1039.49,3435 ; R127.1@1040.51,3435 1103.7,3371.81 1172.69,3371.81 1185,3359.5 1185,3260 1170,3245 U4.3@1136.94,3245
ADC-I-HEAD: C36.1 R51.1 U1.16 | length 2021.5
  Top Layer w10: v1@655,1620 705,1570 ; 693.19,1581.81 705,1570 ; U1.16@784.06,1407.76 784.06,1490.95 705,1570 ; v1(860,3095) 875,3110 C36.1@975,3110 ; C36.1@979.49,3115 R51.1@979.49,3175
  Bottom Layer w10: v1(660,1620) 660,2895 v1(860,3095)
ADC-I-WING: C31.1 R50.2 U1.17 | length 2544.2
  Top Layer w10: v1@697.5,1617.5 803.74,1511.26 U1.17@803.74,1407.76 ; v1(900,3075) 905,3070 1510,3070 1520.51,3080.51 C31.1@1520.51,3115 R50.2@1520.51,3175
  Bottom Layer w10: v1(700,1620) 700,1625 680,1645 680,2880 860,3060 885,3060 v1(900,3075)
ADC-L-I: C12.1 R24.1 U12.3 | length 580.1
  Top Layer w10: R24.1@2124.49,1585 2124.49,1580.51 2155,1550 2365,1550 2455,1460 2480,1460 ; 2475,1460 U12.3@2518.06,1460 2540,1460 2590,1510 C12.1@2624.49,1510
ADC-L-WHEEL: C78.1 R95.1 U1.30 | length 1991.6
  Top Layer w10: U1.30@1022.24,1547.52 1282.48,1547.52 1675,1155 ; 1710,1155 1675,1155 ; R95.1@2685.51,1330 C78.1@2685.51,1270 2685.51,1230.51 2610,1155 1675,1155
ADC-R-I: C13.1 R25.1 U12.5 | length 1375.8
  Top Layer w10: v1(2085,630) R25.1@2124.49,630 ; C13.1@2185.51,1510 U12.5@2291.94,1510 2335,1510 2400,1445 v1(2400,1210) ; v1(2370,660) v1(2370,1000)
  Bottom Layer w10: v1(2085,630) 2340,630 v1(2370,660) ; v1(2370,1000) 2400,1030 v1(2400,1210)
ADC-R-WHEEL: C77.1 R96.2 U1.31 | length 1709.8
  Top Layer w10: U1.31@1022.24,1567.2 1110,1567.2 1292.8,1567.2 1685,1175 ; 1658.25,1201.75 1685,1175 ; 2000,1175 2025,1175 ; R96.2@2185.51,1330 2245,1330 2255,1320 2255,1210 ; C77.1@2285,1210 C77.1@2289.49,1210 2255,1210 ; 1685,1175 2025,1175 ; 2025,1175 2245,1175 2255,1185 2255,1210
ADC-U-HW: R138.1 U1.15 | length 1110.6
  Top Layer w10: R138.1@225,2210 310,2125 310,1785 v1(360,1735) ; v1(655,1580) 660,1580 764.37,1475.63 U1.15@764.37,1407.76
  Bottom Layer w10: v1(360,1735) 500,1735 v1(655,1580)
ADC-U-WHEEL: R70.1 U1.29 | length 2121.5
  Top Layer w10: U1.29@1022.24,1527.83 1272.17,1527.83 1665,1135 ; 1700,1135 1665,1135 ; 2000,1135 2030,1135 ; R70.1@2814.49,1330 2814.49,1294.49 2655,1135 2030,1135 ; 1665,1135 2030,1135
ADC-W-IN: C87.1 R139.1 U4.5 | length 663.6
  Top Layer w10: U4.5@1363.06,3195 1305,3195 1260,3240 1260,3460 1270,3470 1455,3470 1459.49,3465.51 R139.1@1459.49,3435 1519.49,3375 C87.1@1520.51,3375
COM-L: Q7.2 Q8.2 Q9.2 R12.1 R18.2 R19.1 R20.1 R24.2 R30.2 U2.13 | length 2299.7
  Top Layer w10: R12.1@2124.49,1955 R12.1@2124.49,1950 2124.49,1925.51 2135,1915 2215,1915 2230,1900 2230,1875 v1(2250,1855) ; R24.2@2185.51,1585 2195,1585 2285.27,1675.27 U2.13@2306.87,1675.27 v1(2365,1675.27) 2544.73,1675.27 2625,1595 2740,1595 v1(2780,1635) R20.1@2814.49,1635 ; v1(2780,1755) R19.1@2814.49,1755 R18.2@2814.49,1815 ; v1(2985,1650) 2995,1660 3670,1660 R30.2@3700,1690
  Bottom Layer w10: v1(2250,1855) 2365,1740 v1(2365,1675.27) ; v1(2780,1755) v1(2780,1635) 2970,1635 v1(2985,1650)
  other v1: 3645,1790 3680,1790 3715,1790 3755,1790 3640,2145 3675,2145 3710,2145 3750,2145 3645,2545 3680,2545 3715,2545 3755,2545
COM-R: Q10.2 Q11.2 Q12.2 R14.1 R21.2 R22.2 R23.2 R25.2 R31.2 U3.13 | length 2274.9
  Top Layer w10: R14.1@2124.49,690 2184.49,630 R25.2@2185.51,630 v1(2225.51,590) v1@2230,590 ; v1(2255,385) U3.13@2308.46,385 2540,385 2625,300 2735,300 v1(2775,340) R23.2@2814.49,340 ; v1(2775,460) R22.2@2814.51,460 ; R22.2@2814.51,460 R21.2@2814.49,520 ; v1(2935,265) 2940,270 3565,270 3625,330 3625,440 3644.45,459.45 Q12.2@3678.94,459.45
  Bottom Layer w10: v1(2225.51,590) 2225.51,414.49 v1(2255,385) ; v1(2775,460) v1(2775,340) 2850,265 v1(2935,265)
  other v1: 3645,500 3685,500 3720,500 3755,500 3640,830 3680,830 3715,830 3750,830 3640,1160 3680,1160 3715,1160 3750,1160 3765,1400 3765,1435 3765,1470 3765,1510
DIR1N: R131.1 U5.2 U6.2 | length 1469.9
  Top Layer w10: v1(1340,2870) U6.2@1340,2919.61 ; v1(1750,2875) U5.2@1750,2919.61 1750,2945 1770,2965 2460,2965 2550,3055 R131.1@2550,3114.49
  NET-A w10: v1(1340,2870) 1385,2915 1710,2915 v1(1750,2875)
DIR2N: R102.1 U5.10 U6.4 | length 1261.9
  Top Layer w10: U6.4@1240,2919.61 1240,2865 1285,2820 v1(1360,2820) ; U5.10@1600,2620.39 v1(1600,2700) ; v1(1920,3075) R102.1@1920,3114.49
  Bottom Layer w10: v1(1360,2820) 1555,2820 1600,2775 v1(1600,2700) 1785,2700 1920,2835 v1(1920,3075)
DIR3N: R125.1 U6.6 U8.2 | length 716.3
  Top Layer w10: R125.1@670,3114.49 670,3065 715,3020 1110,3020 1140,2990 U6.6@1140,2919.61 ; U8.2@935,2919.61 v1(935,2965)
  Bottom Layer w10: v1(935,2965) v1@935,3015
  other v1: 935,3020
DIR-IO-1: R137.2 U1.58 U5.4 U6.1 | length 2549.5
  Top Layer w10: U1.58@823.43,2002.24 823.43,2308.43 1055,2540 1425,2540 1465,2580 1465,2680 1390,2755 U6.1@1390,2919.61 v1(1390,2970) ; v1(1650,2875) U5.4@1650,2919.61 1650,2975 1680,3005 2170,3005 2235,3070 R137.2@2235,3114.49
  Bottom Layer w10: v1(1390,2970) 1555,2970 v1(1650,2875)
DIR-IO-2: R104.2 U1.57 U5.12 U6.3 | length 2373.3
  Top Layer w10: U1.57@843.11,2002.24 843.11,2293.11 1030,2480 1585,2480 ; U6.3@1290,2919.61 1290,2975 1360,3045 1545.51,3045 R104.2@1615,3114.49 1614.49,3115 v1(1580,3115) ; 1615.26,2510.26 1585,2480 ; v1(1700,2810) U5.12@1700,2620.39 1700,2595 1585,2480
  Bottom Layer w10: v1(1580,3115) 1605,3115 1700,3020 v1(1700,2810)
DIR-IO-3: R126.2 U1.56 U6.5 U8.4 | length 2177.4
  Top Layer w10: R126.2@349.41,3112.29 349.41,3080.59 360,3070 578.28,3070 655,2993.28 655,2850 680,2825 815,2825 835,2845 v1(835,2865) U8.4@835,2919.61 ; U1.56@862.8,2002.24 862.8,2277.8 1035,2450 v1@1050,2450 ; v1(1053.2,2591.8) 1045,2600 1045,2850 v1(1050,2855) 1175,2855 1190,2870 U6.5@1190,2919.61
  NET-A w10: v1@1050,2450 1040,2450 1025,2465 1025,2563.6 v1(1053.2,2591.8)
  Bottom Layer w10: v1(835,2865) 845,2855 v1(1050,2855)
  other v1: 1045,2450
EN-L: D9.2 U1.38 | length 1433.6
  Top Layer w10: U1.38@1022.24,1705 1185,1705 1205,1685 1345,1685 1500,1840 1500,1915 1620,2035 2030,2035 2055,2010 2055,1905 2075,1885 2100,1885 ; 2090,1885 2100,1885 ; D9.2@2125,1885 2100,1885
EN-R: D10.2 U1.26 | length 1659
  Top Layer w10: U1.26@1051.22,1468.78 U1.26@1022.24,1468.78 1022.24,1342.76 1085,1280 1240,1280 1750,770 1985,770 2025,730 2025,595 2055,565 D10.2@2125,565
ENC-HEAD-A: U1.80 U7.3 | length 869.8
  Top Layer w10: U7.3@250,2620.39 250,2555 350,2455 350,1875 362.52,1862.48 U1.80@427.76,1862.48
ENC-HEAD-A1: C30.1 J4.2 R47.1 U7.17 | length 3021.3
  Top Layer w10: U7.17@295,2919.61 295,2990 255,3030 255,3405 0,3660 0,4171.72 88.28,4260 1203.31,4260 1253.31,4210 J4.2@1253.31,4162.8 1253.31,4133.31 1195.68,4075.68 C30.1@1195.68,3983.31 1195.68,3982.29 R47.1@1255.68,3922.29
ENC-HEAD-B: U1.81 U7.2 | length 916.2
  Top Layer w10: U7.2@200,2620.39 200,2575 330,2445 330,1865 352.2,1842.8 U1.81@427.76,1842.8
ENC-HEAD-B1: C29.1 J4.1 R46.1 U7.18 | length 3151.7
  Top Layer w10: U7.18@245,2919.61 250,2924.61 250,3000 235,3015 235,3395 -20,3650 -20,4180 80,4280 1295,4280 1351.74,4223.26 J4.1@1351.74,4162.8 1315.68,4126.74 C29.1@1315.68,3983.31 1375.68,3923.31 R46.1@1375.68,3922.29
ENC-L-A: C48.1 J8.5 R64.2 U11.15 | length 670.8
  Top Layer w10: U11.15@3824.61,3070 3875,3070 3940,3135 4065,3135 4070.51,3140.51 C48.1@4070.51,3170 R64.2@4134.49,3170 4135,3170.51 4135,3200 4140,3205 4280,3205 4328.11,3253.11 J8.5@4385,3253.11
ENC-L-A1: U1.90 U11.5 | length 3723
  Top Layer w10: U1.90@427.76,1665.63 470.63,1665.63 v1(495,1690) ; v1(980,2075) 980,2090 1155,2265 ; 1165,2275 1155,2265 ; U11.5@3525.39,3120 3030,3120 2530,2620 2130,2620 1825,2315 1205,2315 1155,2265
  NET-A w10: v1(495,1690) 595,1690 v1(980,2075)
ENC-L-B: C49.1 J8.4 R65.2 R147.1 U11.14 | length 3736.4
  Top Layer w10: R147.1@1235,2060.51 1235,2220 1270,2255 1855,2255 2160,2560 2560,2560 3005,3005 v1(3425,3005) ; v1(3730,3020) U11.14@3824.61,3020 3895,3020 3940,3065 4060,3065 4070.51,3075.51 C49.1@4070.51,3100 R65.2@4134.49,3100 4135,3100.51 4135,3130 4140,3135 4295,3135 4334.37,3174.37 J8.4@4385,3174.37
  Bottom Layer w10: v1(3425,3005) 3715,3005 v1(3730,3020)
ENC-L-B1: U1.91 U11.6 | length 3739.2
  Top Layer w10: U1.91@427.76,1645.95 v1@494.06,1645.95 ; v1(1020,2035) 1020,2100 1180,2260 ; 1170,2250 1180,2260 ; U11.6@3525.39,3070 3010,3070 2540,2600 2140,2600 1835,2295 1215,2295 1180,2260
  NET-A w10: v1(495,1645) 496.81,1646.81 631.81,1646.81 v1(1020,2035)
ENC-L-Z: C50.1 J8.3 R60.1 R66.2 U11.13 | length 3849.4
  Top Layer w10: R60.1@1175,2060.51 1175,2225 1225,2275 1845,2275 2150,2580 2550,2580 3010,3040 v1(3455,3040) ; v1(3690,3045) 3690,3015 3735,2970 U11.13@3824.61,2970 3920,2970 3945,2995 4065,2995 4070.51,3000.51 C50.1@4070.51,3030 R66.2@4134.49,3030 4135,3030.51 4135,3060 4140,3065 4305,3065 4335.63,3095.63 J8.3@4385,3095.63
  Bottom Layer w10: v1(3455,3040) 3685,3040 v1(3690,3045)
ENC-L-Z1: U1.46 U11.7 | length 2982.6
  Top Layer w10: U1.46@1022.24,1862.48 1162.48,1862.48 1535,2235 1865,2235 2170,2540 2570,2540 3005,2975 3445,2975 3490,3020 U11.7@3525.39,3020
ENC-R-A: C61.1 J10.5 R75.2 U13.12 | length 3772.9
  Top Layer w10: R75.2@1270,604.49 C61.1@1270,540.51 1299.49,540.51 1305,535 1305,435 1330,410 1530,410 1555,385 U13.12@1555,335.39 1555,285 1675,165 1865,165 ; 1850,165 1865,165 ; 2590.15,94.85 2572.5,112.5 ; J10.5@4425,341.89 4411.89,341.89 4305,235 4305,125 4220,40 2645,40 2572.5,112.5 ; 1865,165 2520,165 2572.5,112.5
ENC-R-A1: U1.23 U13.8 | length 1173.3
  Top Layer w10: U1.23@921.85,1407.76 921.85,1313.15 v1(960,1275) ; v1(970,1090) 980,1080 1180,1080 1605,655 U13.8@1605,634.61
  Bottom Layer w10: v1(960,1275) 960,1100 v1(970,1090)
ENC-R-B: C62.1 J10.4 R76.2 R150.1 U13.13 | length 5926.7
  Top Layer w10: R150.1@164.49,1740 105,1740 80,1715 80,1280 340,1020 1120,1020 1305,835 1305,740 ; 1305,755 1305,740 ; 1855,185 1880,185 ; J10.4@4425,420.63 4285,280.63 4285,135 4210,60 2653.28,60 2528.28,185 1880,185 ; 1305,740 1305,610 1310.51,604.49 R76.2@1340,604.49 C62.1@1340,540.51 1369.49,540.51 1375,535 1375,450 1385,440 1540,440 1605,375 U13.13@1605,335.39 1605,285 1705,185 1880,185
ENC-R-B1: U1.24 U13.7 | length 1103.8
  Top Layer w10: U1.24@941.54,1407.76 941.54,1338.46 v1(1005,1275) ; v1(1230,1085) 1255,1085 1655,685 U13.7@1655,634.61
  Bottom Layer w10: v1(1005,1275) 1040,1275 v1(1230,1085)